# Altium PCB RadioRepeater.PcbDoc
Units mm, origin at the board's own origin, x right, y up, seen from the top; angles counter-clockwise.
Board outline 70 x 40 mm, 4 copper layers (Top Layer, GND, Power, Bottom Layer), stack 1.57 mm thick; 34 components, 38 nets, 74 pads, 0 vias.
Unrouted connection lines stored in the file: 52.
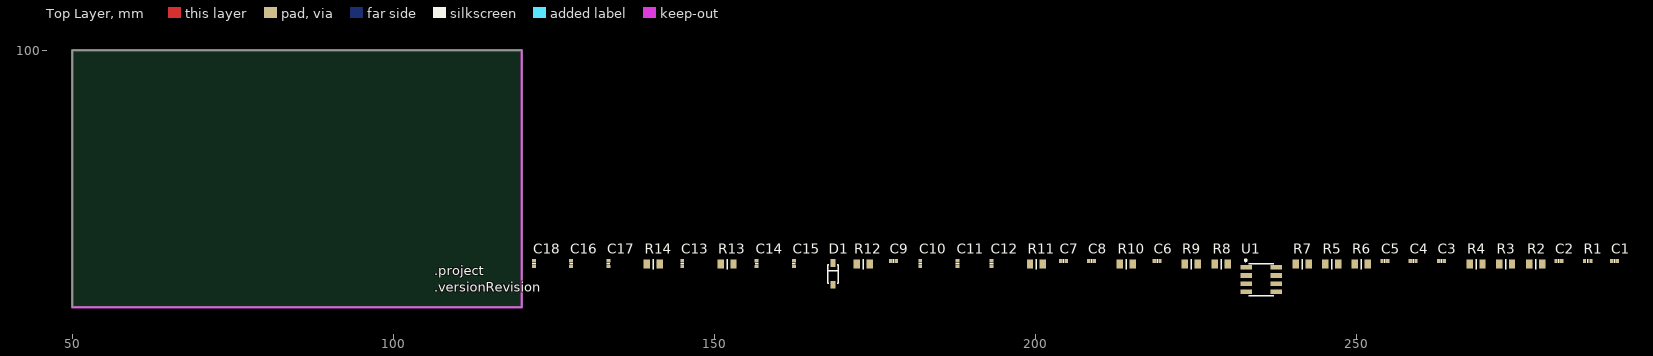
[diagram p0: Top Layer view]
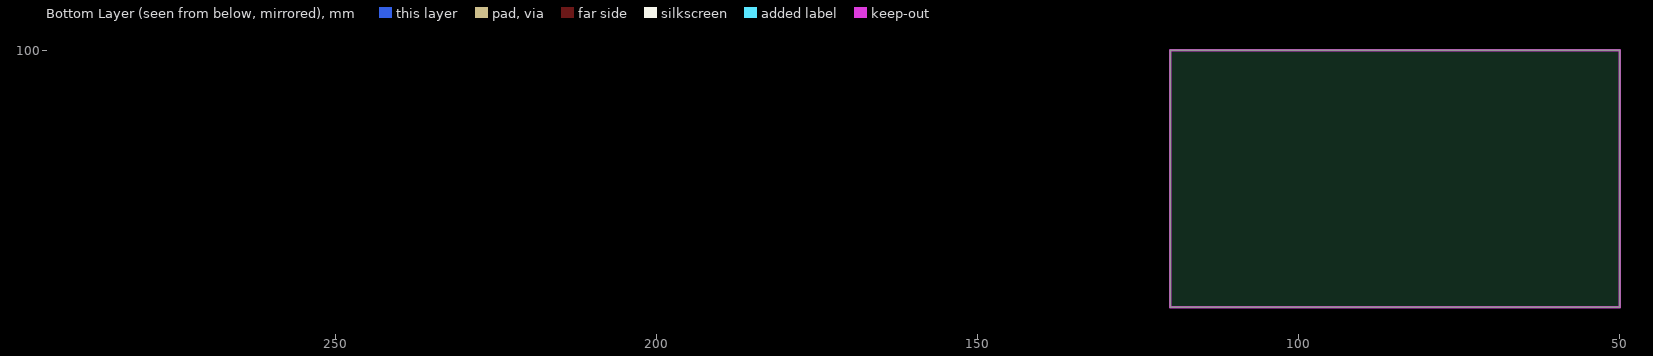
[diagram p1: Bottom Layer view, seen from below]

## Layer stack, top to bottom
Top Solder: solder mask 0.01, Solder Resist, Dk 3.5
Top Layer: signal copper 0.035
Dielectric 1: prepreg 0.36, PR2116, Dk 4.2
GND: signal copper 0.035
Dielectric 3: core 0.71, FR-4, Dk 4.2
Power: signal copper 0.035
Dielectric 2: prepreg 0.36, PR2116, Dk 4.2
Bottom Layer: signal copper 0.035
Bottom Solder: solder mask 0.01, Solder Resist, Dk 3.5

## Board outline
50,60 120,60 120,100 50,100

## Design rules (kind name [scope] priority, off if disabled: settings)
Clearance [All] p1: gap=0.2 ignorepadtopadclearanceinfootprint=FALSE except(0: Arc-Hole Track-Hole SMDPad-Hole THPad-Hole Via-Hole Fill-Hole Poly-Hole Region-Hole Text-Hole)
ComponentClearance [All] p1: gap=0.01 collisioncheckmode=3 verticalgap=0 showdistances=FALSE
DiffPairsRouting [All] p1: maxlimit=0.254 minlimit=0.254 mostfreqgap=0.254 toplayer_minwidth=0.381 toplayer_maxwidth=0.381 toplayer_prefwidth=0.381 midlayer1_minwidth=0.381 midlayer1_maxwidth=0.381 midlayer1_prefwidth=0.381 midlayer2_minwidth=0.381 midlayer2_maxwidth=0.381 midlayer2_prefwidth=0.381 bottomlayer_minwidth=0.381 bottomlayer_maxwidth=0.381 bottomlayer_prefwidth=0.381 maxuncoupledlength=12.7
MinimumSolderMaskSliver [All] p1: minsoldermaskwidth=0.05
PolygonConnect PolygonConnect_2 [All vs IsVia] p1: connectstyle=Direct reliefconductorwidth=0.254 reliefentries=4 polygonreliefangle="90 Angle" airgapwidth=0.254
PolygonConnect PolygonConnect_1 [All vs Not InNet('GND')] p2: connectstyle=Direct reliefconductorwidth=0.254 reliefentries=4 polygonreliefangle="90 Angle" airgapwidth=0.254
PolygonConnect [All] p3: connectstyle=Relief reliefconductorwidth=0.4 reliefentries=4 polygonreliefangle="90 Angle" airgapwidth=0.2
RoomDefinition "[03] - RF_433" [InComponentClass('[03] - RF_433')] p1: confinementstyle=ConfineIn formatcopy=TRUE lockcomponents=FALSE outline 121.1,61.5 292.599,61.5 292.599,70.3 121.1,70.3
RoutingVias [All] p1: holewidth=0.3 width=0.6 viastyle="Through Hole" minholewidth=0.3 minwidth=0.6 maxholewidth=0.4 maxwidth=0.8
SilkToSilkClearance [All] p1: silktosilkclearance=0.01
SilkToSolderMaskClearance [IsPad] p1: minsilkscreentomaskgap=0.01 clearancetoexposedcopper=TRUE
SolderMaskExpansion [All] p1: expansion=0.102 istentingtop=FALSE
Width [All] p1: maxlimit=4 minlimit=0.2 preferedwidth=0.3
25 further rules are at their usual default settings.

## Classes and differential pairs
differential pair class RF_DIFFPAIRS_50: RF_2
net class RF_DIFFPAIR: RF_2_N RF_2_P
net class RF_SIGNAL: ANTENNA_2 RF_SIGNAL_2 RF_SIGNAL_AMP_IN_2 RF_SIGNAL_AMP_OUT_2 RF_SIGNAL_BPS_2
differential pair RF_2: +RF_2_P -RF_2_N

## Components (designator, comment, footprint, x,y, rotation, side; value= is the part's Value field where it differs from the comment)
C1 "1uF" CAP0402 290.299,67.2 r0 top
C2 "10nF" CAP0402 281.599,67.2 r0 top
C3 "390pF" CAP0402 263.299,67.2 r0 top
C4 "390pF" CAP0402 258.899,67.2 r0 top
C5 "0.01uF" CAP0402 254.499,67.2 r0 top
C6 "390pF" CAP0402 219,67.2 r0 top
C7 "390pF" CAP0402 204.4,67.2 r0 top
C8 "0.47uF" CAP0402 208.8,67.2 r0 top
C9 "390pF" CAP0402 177.9,67.2 r0 top
C10 "390pF" CAP0402 182.1,66.8 r90 top
C11 "0.1uF" CAP0402 187.9,66.8 r90 top
C12 "1uF" CAP0402 193.2,66.8 r90 top
C13 "390pF" CAP0402 145,66.8 r90 top
C14 "0.1uF" CAP0402 156.6,66.8 r90 top
C15 "390pF" CAP0402 162.4,66.8 r90 top
C16 "27p" CAP0402 127.7,66.8 r90 top
C17 "27p" CAP0402 133.5,66.8 r90 top
C18 "100n" CAP0402 121.9,66.8 r90 top
D1 "MM3Z3V9T1" SOD123 168.5,65.2 r90 top
R1 "10k" RES0402 286.099,67.2 r0 top
R2 "100k" RES0805 277.999,66.7 r0 top
R3 "5.1k" RES0805 273.299,66.7 r0 top
R4 "100k" RES0805 268.699,66.7 r0 top
R5 "100k" RES0805 246.2,66.7 r0 top
R6 "39" RES0805 250.799,66.7 r0 top
R7 "0.1" RES0805 241.6,66.7 r0 top
R8 "2.2k" RES0805 229,66.7 r0 top
R9 "100k" RES0805 224.3,66.7 r0 top
R10 "330" RES0805 214.2,66.7 r0 top
R11 "100k" RES0805 200.2,66.7 r0 top
R12 "510" RES0805 173.2,66.7 r0 top
R13 "1.8k" RES0805 152,66.7 r0 top
R14 "56k" RES0805 140.5,66.7 r0 top
U1 "LM2904" SOIC8 235.2,64.3 r0 top

## Footprints (in the part's own frame and the unit in brackets; to place one, negate y for a bottom-side part, rotate by r counter-clockwise, add the part's x,y. Pads: shape width x height; smd on the part's side, far side on the other; paste and mask are expansions set on the pad)
CAP0402 [mm]
  rect 0.5x0.6 smd: 1(-0.45,0) 2(0.45,0)
  silkscreen extent 0,-0.25 0,0.25, body extent -0.5,-0.26 0.5,0.26, height 0.36
RES0402 [mm]
  rect 0.5x0.6 smd: 1(-0.5,0) 2(0.5,0)
  silkscreen extent 0,-0.25 0,0.25, body extent -0.57,-0.27 0.58,0.28, height 0.41
RES0805 [mm] "Chip Resistor; Body 2 x 1.3 mm (LxW typ)"
  rect 1x1.4 smd: 1(-1,0) 2(1,0)
  silkscreen extent 0,-0.75 0,0.75, body extent -1.15,-0.67 1.15,0.68, height 0.75
SOD123 [mm] "SOD-123; 2 Leads; Body 2.7 x 1.6 mm, (LxW)"
  rect 1.2x0.8 smd: 1(-1.7,0) 2(1.7,0)
  silkscreen extent -1.45,-0.85 1.45,0.85, body extent -1.93,-0.85 1.93,0.85, height 1.42
SOIC8 [mm]
  rect 1.78x0.72 smd: 1(-2.34,1.905) 2(-2.34,0.635) 3(-2.34,-0.635) 4(-2.34,-1.905) 5(2.34,-1.905) 6(2.34,-0.635) 7(2.34,0.635) 8(2.34,1.905)
  silkscreen extent -2.55,-2.5 1.95,3.15, body extent -3,-2.45 3,2.45, height 1.7

## Part data
C1 C2 C3 C4 C5 C6 C7 C8 C9 C10 C11 C12 C13 C14 C15 C16 C17 C18: library part Cap, "Capacitor", Supplier 1=Digi-Key
D1: library part Diode_Zener, "Zener Diode", Supplier 1=Digi-Key
R1 R2 R3 R4 R5 R6 R7 R8 R9 R10 R11 R12 R13 R14: library part Res, "Resistor", Supplier 1=Digi-Key
U1: library part "OPAMP x2"

## Nets (pads, with @x,y where several pads share a name; then routed paths per layer and width w, separated by ;. In a path a pad name is that pad's centre, name@x,y a point inside that pad or via, vN(x,y) a via of type N, cw(c..) or ccw(c..) an arc to the next point about the centre after c; other vN are vias at no path point)
+3V3: 
+BATT: C1.1 R1.2 R6.1 R7.2
Amplifier_VDD_2: C10.2 C11.2 C12.2 R2.1 R7.1
Amplifier_VGG_2: C15.2 D1.2
ANTENNA_2: 
GND: C1.2 C2.1 C3.1 C6.1 C7.1 C8.1 C9.1 C10.1 C11.1 C12.1 C13.1 C14.1 C15.1 C16.2 C17.2 C18.2 D1.1 R4.1 R9.1 R10.1 R13.1 R14.1 U1.4
NetC2_2: C2.2 U1.8
NetC3_2: C3.2 C4.2 R2.2 R4.2 U1.6
NetC4_1: C4.1 R9.2
NetC5_1: C5.1 C7.2 R3.1
NetC5_2: C5.2 C13.2 R3.2 R12.2 U1.1
NetC6_2: C6.2 R5.2 U1.5
NetC8_2: C8.2 R8.1 R10.2
NetC9_2: C9.2 R11.1 U1.3
NetC14_2: C14.2 R12.1 R13.2
NetC16_1: C16.1
NetC17_1: C17.1
NetC18_1: C18.1
NetQ2_B: U1.7
NetQ2_C: R5.1 R6.2
NetR8_2: R8.2 U1.2
NetR14_2: R14.2
RF_2_N: 
RF_2_P: 
RF_CS: 
RF_GDO0: 
RF_GDO2: 
RF_SCLK: 
RF_SI: 
RF_SIGNAL_2: 
RF_SIGNAL_AMP_IN_2: 
RF_SIGNAL_AMP_OUT_2: 
RF_SIGNAL_BPS_2: 
RF_SO: 
RF_TX_AMP: 
RF_TX_BPS/RX: 
RF_TX_EN: R1.1
RF_TX_PWR_SET: R11.2

## Keep-outs
Keep-Out Layer:
  the board outline again, w0.4

## Silkscreen, mask and mechanical layers (free items; w line width, h text height)
Top Overlay:
  text ".project" at 106.4,65 h1.5
  text ".versionRevision" at 106.4,62.4 h1.5
Outline:
  the board outline again, w0.2